# Altium PCB PCB1.PcbDoc
Units mil, origin at the board's own origin, x right, y up, seen from the top; angles counter-clockwise.
Board outline 6000 x 4000 mil, 2 copper layers (Top Layer, Bottom Layer); 30 components, 30 nets, 124 pads, 0 vias.
Unrouted connection lines stored in the file: 71.
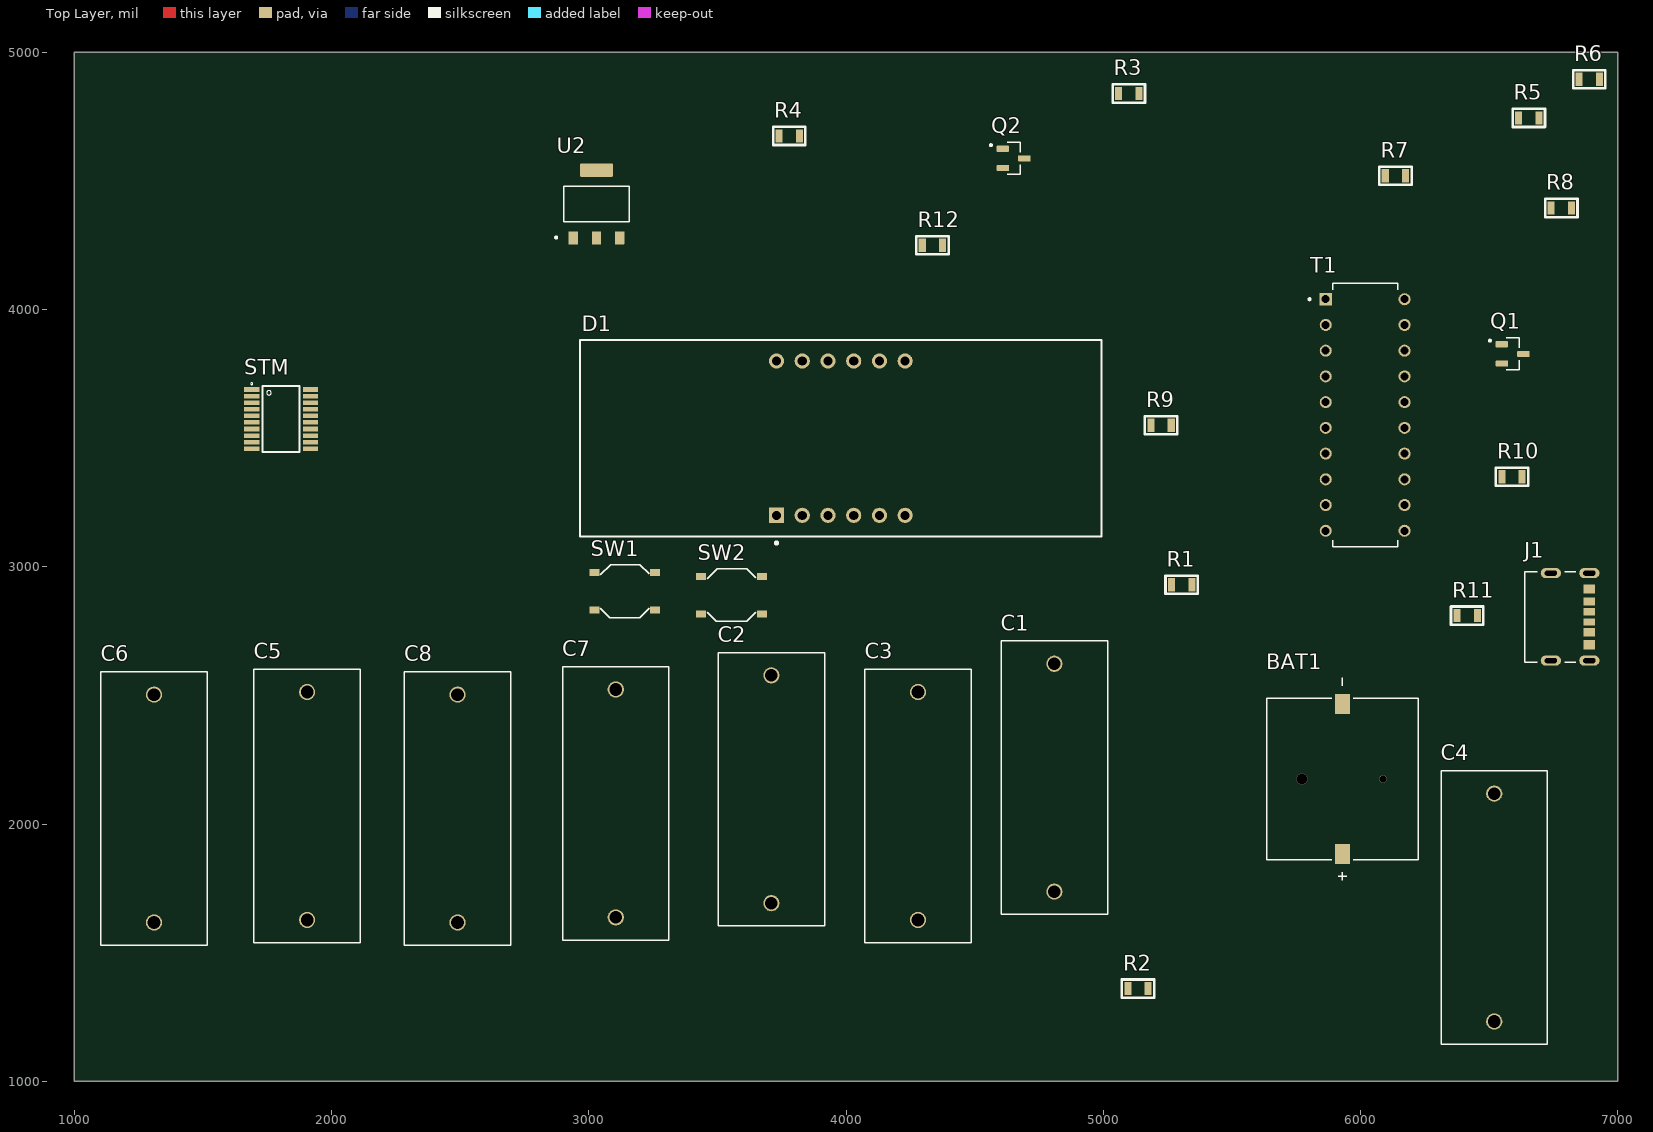
[diagram p0: Top Layer view]
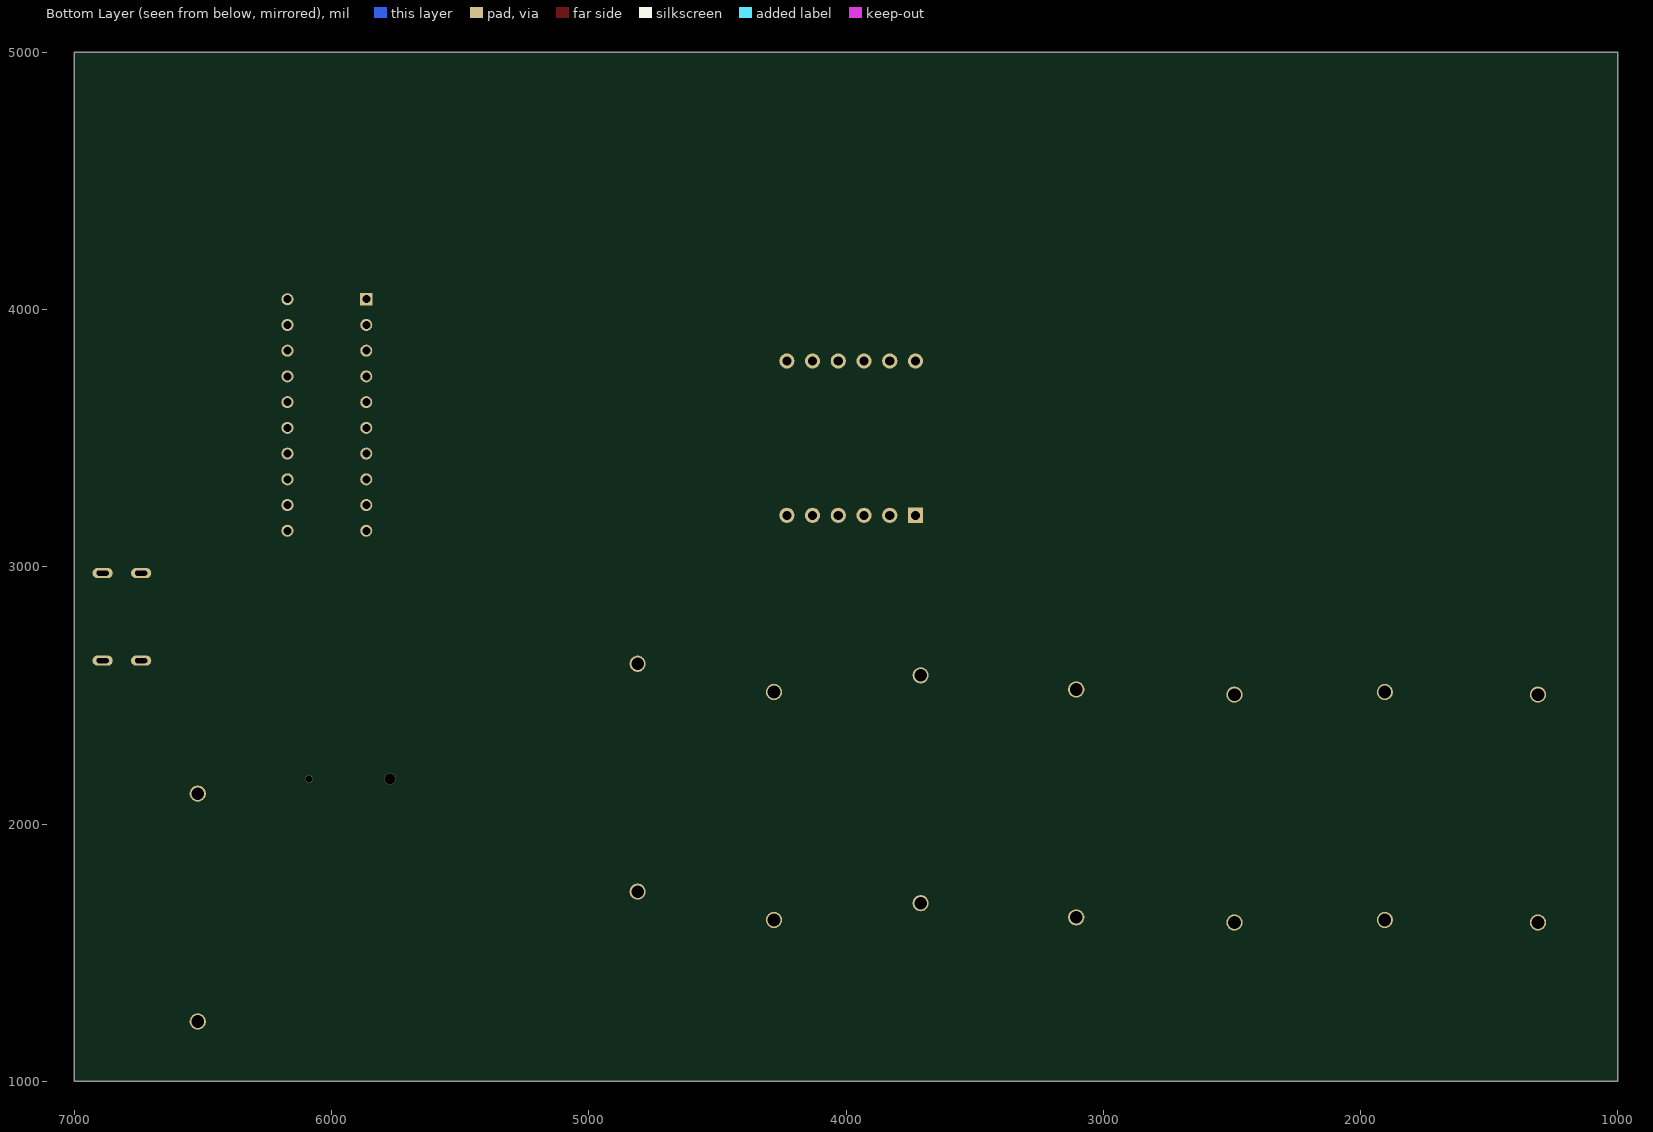
[diagram p1: Bottom Layer view, seen from below]

## Layer stack, top to bottom
Top Solder: solder mask 0.4, Solder Resist, Dk 3.5
Top Layer: signal copper 1.4
Dielectric 1: dielectric 12.6, FR-4, Dk 4.8
Bottom Layer: signal copper 1.4
Bottom Solder: solder mask 0.4, Solder Resist, Dk 3.5

## Board outline
1000,1000 7000,1000 7000,5000 1000,5000

## Design rules (kind name [scope] priority, off if disabled: settings)
Clearance [All] p1: gap=10 ignorepadtopadclearanceinfootprint=FALSE
PolygonConnect [All] p1: connectstyle=Relief reliefconductorwidth=10 reliefentries=4 polygonreliefangle="90 Angle" airgapwidth=10
RoutingVias [All] p1: holewidth=28 width=50 viastyle="Through Hole" minholewidth=28 minwidth=50 maxholewidth=28 maxwidth=50
SolderMaskExpansion [All] p1: expansion=4 istentingtop=FALSE
Width [All] p1: maxlimit=10 minlimit=10 preferedwidth=10
30 further rules are at their usual default settings.

## Components (designator, comment, footprint, x,y, rotation, side; value= is the part's Value field where it differs from the comment)
BAT1 "CR2032" BAT_1072 5930,2175 r90 top
C1 "100p" CAPRR2250W100L2700T1050H1900 4810,2180 r90 top
C2 "100p" CAPRR2250W100L2700T1050H1900 3710,2135 r90 top
C3 "100u" CAPRR2250W100L2700T1050H1900 4280,2070 r90 top
C4 "0.1u" CAPRR2250W100L2700T1050H1900 6520,1675 r90 top
C5 "0.1u" CAPRR2250W100L2700T1050H1900 1905,2070 r90 top
C6 "10u" CAPRR2250W100L2700T1050H1900 1310,2060 r90 top
C7 "22u" CAPRR2250W100L2700T1050H1900 3105,2080 r90 top
C8 "1u" CAPRR2250W100L2700T1050H1900 2490,2060 r90 top
D1 "Display" HDSP-B4 3980,3500 r0 top
J1 "USB Type-C" CUI_UJC-HP-3-SMT-TR 6889.8,2805.32 r270 top
Q1 "BSS138" SOT95P240X111-3N 6591.73,3827.6 r0 top
Q2 "BSS138" SOT95P240X111-3N 4651.73,4587.6 r0 top
R1 "1k" Resistor 5305,2930 r180 top
R2 "1k" Resistor 5135,1360 r0 top
R3 "10k" Resistor 5099.37,4840 r0 top
R4 "10k" Resistor 3779.37,4675 r0 top
R5 "10k" Resistor 6654.37,4745 r0 top
R6 "10k" Resistor 6889.37,4895 r0 top
R7 "1k" Resistor 6135.63,4520 r0 top
R8 "1k" Resistor 6780.63,4395 r0 top
R9 "10k" Resistor 5225,3550 r0 top
R10 "10k" Resistor 6589.37,3350 r0 top
R11 "10k" Resistor 6415,2810 r0 top
R12 "10k" Resistor 4335.63,4250 r0 top
STM "STM8S103F3P6" SOP65P640X120-20N 1804.17,3573.98 r0 top
SW1 "SMD-BUTTON(4P-5.2X5.2X1.5MM-SKQGAKE010)" SW4-SMD-5.2X5.2X1.5MM 3140,2905 r0 top
SW2 "SMD-BUTTON(4P-5.2X5.2X1.5MM-SKQGAKE010)" SW4-SMD-5.2X5.2X1.5MM 3555,2890 r0 top
T1 "TM1637" DIP778W43P254L2612H431Q20N 6018.15,3590 r0 top
U2 "AMS1117" SOT229P700X180-4N 3030,4410 r0 top

## Footprints (in the part's own frame and the unit in brackets; to place one, negate y for a bottom-side part, rotate by r counter-clockwise, add the part's x,y. Pads: shape width x height; smd on the part's side, far side on the other; paste and mask are expansions set on the pad)
BAT_1072 [mm]
  rect 2x1.5 smd: N(7.4,0) P(-7.4,0)
  round 1.1 hole 1.1 unplated: ""(0,4)
  round 0.7 hole 0.7 unplated: ""(0,-4)
  silkscreen extent -10,-7.5 10,7.5, body extent -7.95,-5.2 7.95,5.2, height 3.75
CAPRR2250W100L2700T1050H1900 [mm]
  round 1.6 hole 1.25: 1(-11.25,0) 2(11.25,0)
  silkscreen extent -13.5,-5.25 13.5,5.25, body extent -13.5,-5.25 13.5,5.25, height 19
CUI_UJC-HP-3-SMT-TR [mm]
  rect 0.7x1.15 smd: A5(-0.5,0.005) B5(0.5,0.005)
  rect 0.8x1.15 smd: A9(1.52,0.005) B9(-1.52,0.005)
  rect 0.9x1.15 smd: A12(2.75,0.005) B12(-2.75,0.005)
  oval 1x2 hole 0.5 slot 1.2 at 90 deg: S1(-4.32,0) S2(4.32,0) S3(-4.32,-3.8) S4(4.32,-3.8)
  silkscreen extent -4.47,-6.4 4.47,-1.35, body extent -4.47,-4.28 4.47,2.62, height 1.93
DIP778W43P254L2612H431Q20N [mm]
  rect 1.19x1.19 / inner round 1.19 / far side rect 1.19x1.19 hole 0.79: 1(-3.89,11.43)
  round 1.19 hole 0.79: 2(-3.89,8.89) 3(-3.89,6.35) 4(-3.89,3.81) 5(-3.89,1.27) 6(-3.89,-1.27) 7(-3.89,-3.81) 8(-3.89,-6.35) 9(-3.89,-8.89) 10(-3.89,-11.43) 11(3.89,-11.43) 12(3.89,-8.89) 13(3.89,-6.35) 14(3.89,-3.81) 15(3.89,-1.27) 16(3.89,1.27) 17(3.89,3.81) 18(3.89,6.35) 19(3.89,8.89) 20(3.89,11.43)
  silkscreen extent -5.58,-13 3.2,13, body extent -4.03,-13 4.03,13, height 4.31
HDSP-B4 [mm] "LED, 7-Segment Display, 14.22 mm, Four Digit, 18:88; 12 Leads; Row Space 15.24 mm; Pitch 2.54 mm"
  rect 1.5x1.5 hole 0.9: 1(-6.35,-7.62)
  round 1.5 hole 0.9: 2(-3.81,-7.62) 3(-1.27,-7.62) 4(1.27,-7.62) 5(3.81,-7.62) 6(6.35,-7.62) 7(6.35,7.62) 8(3.81,7.62) 9(1.27,7.62) 10(-1.27,7.62) 11(-3.81,7.62) 12(-6.35,7.62)
  silkscreen extent -25.75,-10.47 25.75,9.7
Resistor [mm]
  rect 0.7x1.3 smd: 1(-1,0) 2(1,0)
  silkscreen extent -1.6,-0.9 1.6,0.9
SOP65P640X120-20N [mm]
  rect 1.5x0.45 smd: 1(-2.9,2.925) 2(-2.9,2.275) 3(-2.9,1.625) 4(-2.9,0.975) 5(-2.9,0.325) 6(-2.9,-0.325) 7(-2.9,-0.975) 8(-2.9,-1.625) 9(-2.9,-2.275) 10(-2.9,-2.925) 11(2.9,-2.925) 12(2.9,-2.275) 13(2.9,-1.625) 14(2.9,-0.975) 15(2.9,-0.325) 16(2.9,0.325) 17(2.9,0.975) 18(2.9,1.625) 19(2.9,2.275) 20(2.9,2.925)
  silkscreen extent -3,-3.25 1.83,3.6, body extent -3.2,-3.25 3.2,3.25, height 0.53
SOT95P240X111-3N [mm]
  rrect25% 1.23x0.6 smd: 1(-1.06,0.95) 2(-1.06,-0.95) 3(1.06,0)
  silkscreen extent -2.35,-1.57 0.65,1.57, body extent -1.2,-1.45 1.2,1.45, height 1.11
SOT229P700X180-4N [mm]
  rrect15% 0.93x1.31 smd: 1(-2.29,-3.345) 2(0,-3.345) 3(2.29,-3.345)
  rrect15% 3.24x1.31 smd: 4(0,3.345)
  silkscreen extent -4.09,-3.4 3.25,1.75, body extent -3.25,-3.5 3.25,3.5, height 1.8
SW4-SMD-5.2X5.2X1.5MM [mm]
  rect 1x0.7 smd: 1(-3,1.85) 2(3,1.85) 3(-3,-1.85) 4(3,-1.85)
  silkscreen extent -2.4,-2.6 2.4,2.6

## Part data
BAT1: library part Battery1072
C1 C2 C3 C4 C5 C6 C7 C8: library part Capacitor
D1: library part Display7Segmwnt4Digit
J1: library part USBTypeC
R1 R2 R3 R4 R5 R6 R7 R8 R9 R10 R11 R12: library part Resistor
STM: library part STM8S103F3
SW1 SW2: library part SWButton

## Nets (pads, with @x,y where several pads share a name; then routed paths per layer and width w, separated by ;. In a path a pad name is that pad's centre, name@x,y a point inside that pad or via, vN(x,y) a via of type N, cw(c..) or ccw(c..) an arc to the next point about the centre after c; other vN are vias at no path point)
+3.3: C7.1 STM.9 SW1.4 SW2.4 U2.2
"+3.3 V": C5.1 Q1.1 Q2.1 R1.2 R2.2 R3.2 R4.2 R5.2 R6.2 R10.1 R12.1
+5: C3.1 C4.1 C6.1 J1.A9 J1.B9 R9.1 R11.1 T1.16 U2.3
GND: BAT1.N C1.2 C2.2 C3.2 C4.2 C5.2 C6.2 C7.2 C8.2 J1.A12 J1.B12 J1.S1 J1.S2 J1.S3 J1.S4 R7.1 R8.1 STM.7 U2.1
NetBAT1_P: BAT1.P
NetC1_1: C1.1 Q1.2 R1.1 R10.2 STM.2
NetC2_1: C2.1 Q2.2 R2.1 R12.2 STM.1
NetC8_1: C8.1 STM.8
NetD1_1: D1.1 T1.6
NetD1_2: D1.2 T1.5
NetD1_3: D1.3 T1.9
NetD1_4: D1.4 T1.4
NetD1_5: D1.5 T1.8
NetD1_6: D1.6 T1.12
NetD1_7: D1.7 T1.3
NetD1_8: D1.8 T1.13
NetD1_9: D1.9 T1.14
NetD1_10: D1.10 T1.7
NetD1_11: D1.11 T1.2
NetD1_12: D1.12 T1.15
NetDS_1: R5.1
NetDS_3: R6.1
NetDS_16: R3.1 STM.12
NetQ1_3: Q1.3 R9.2 T1.18
NetQ2_3: Q2.3 R11.2 T1.17
NetR4_1: R4.1 STM.11
NetR7_2: R7.2 SW1.2
NetR8_2: R8.2 SW2.2
NetSTM_13: STM.13 SW1.1
NetSTM_17: STM.17 SW2.1
pads on no net: BAT1. J1.A5 J1.B5 STM.3 STM.4 STM.5 STM.6 STM.10 STM.14 STM.15 STM.16 STM.18 STM.19 STM.20 SW1.3 SW2.3 T1.1 T1.10 T1.11 T1.19 T1.20 U2.4